# Altium PCB Source_module.PcbDoc (part 1 of 2)
Units mil, origin at the board's own origin, x right, y up, seen from the top; angles counter-clockwise.
Board outline 3715 x 2515 mil, 2 copper layers (Top Layer, Bottom Layer); 125 components, 72 nets, 409 pads, 106 vias.
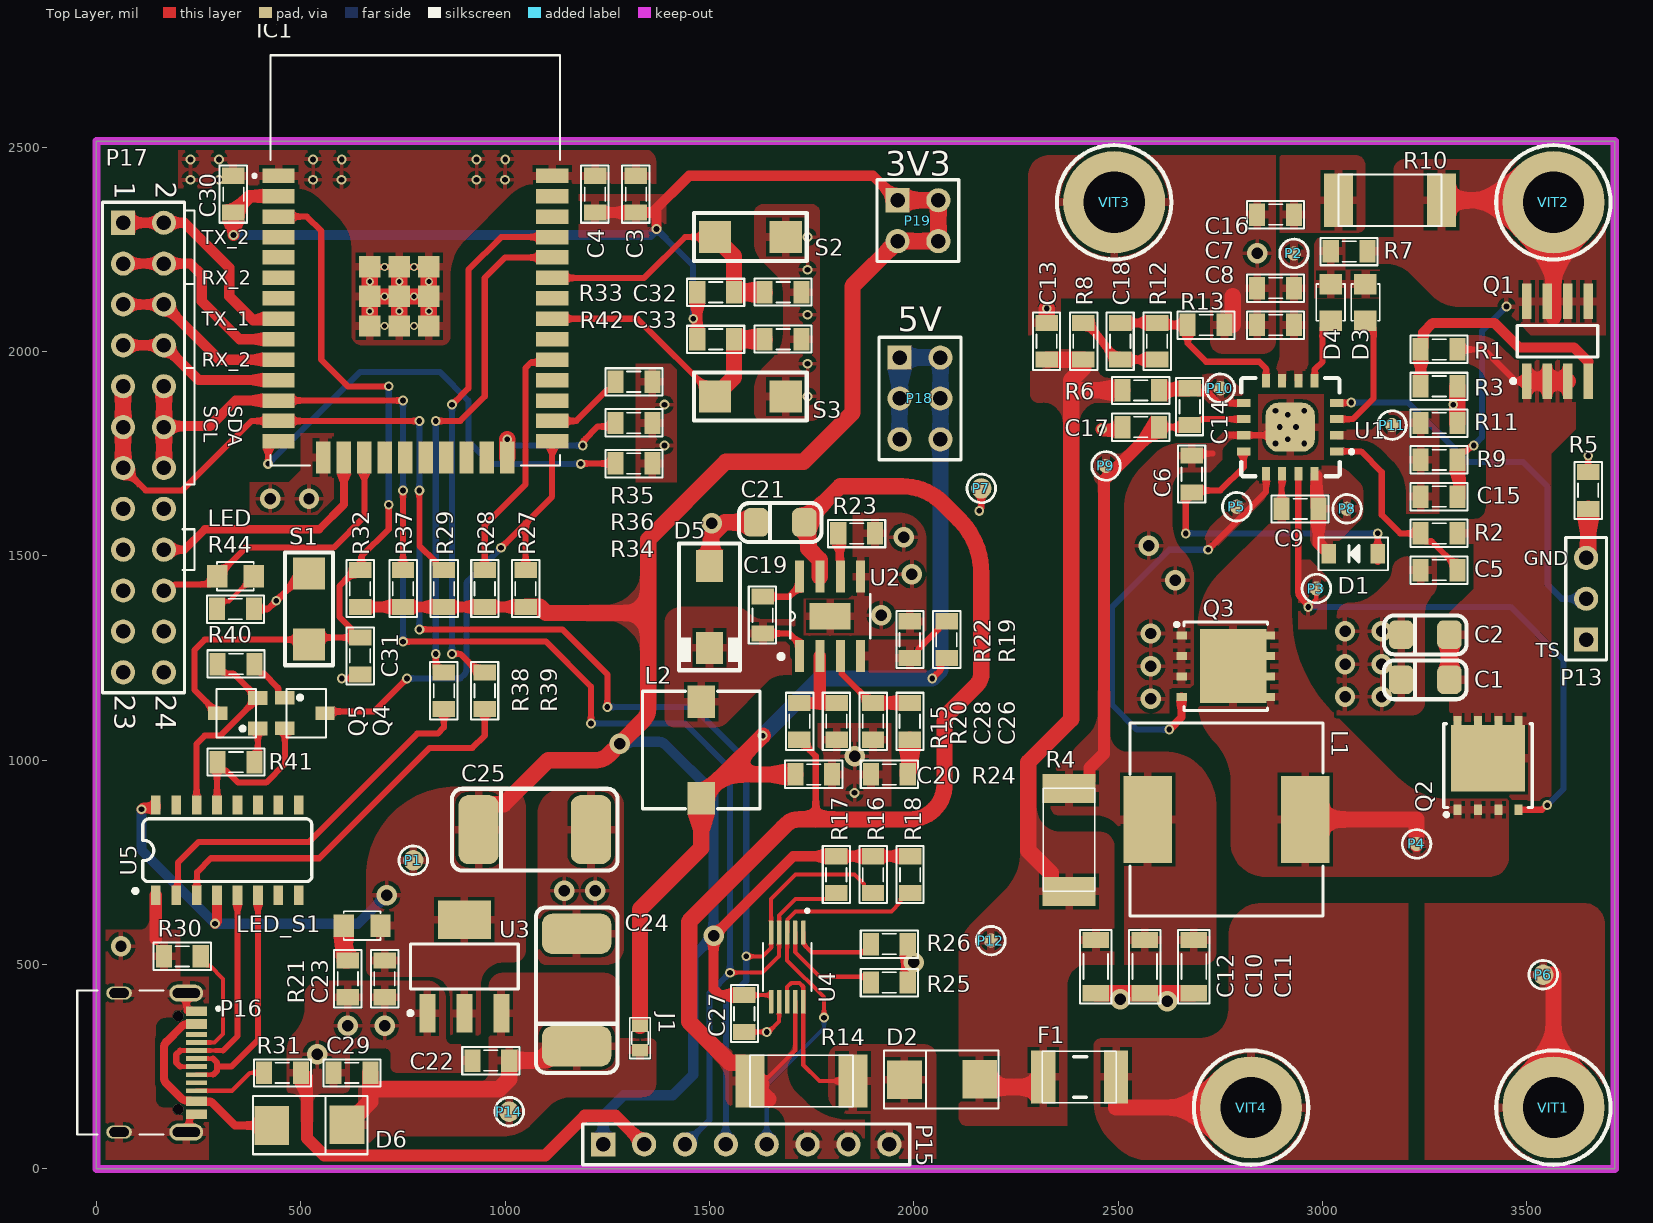
[diagram p0: Top Layer view]
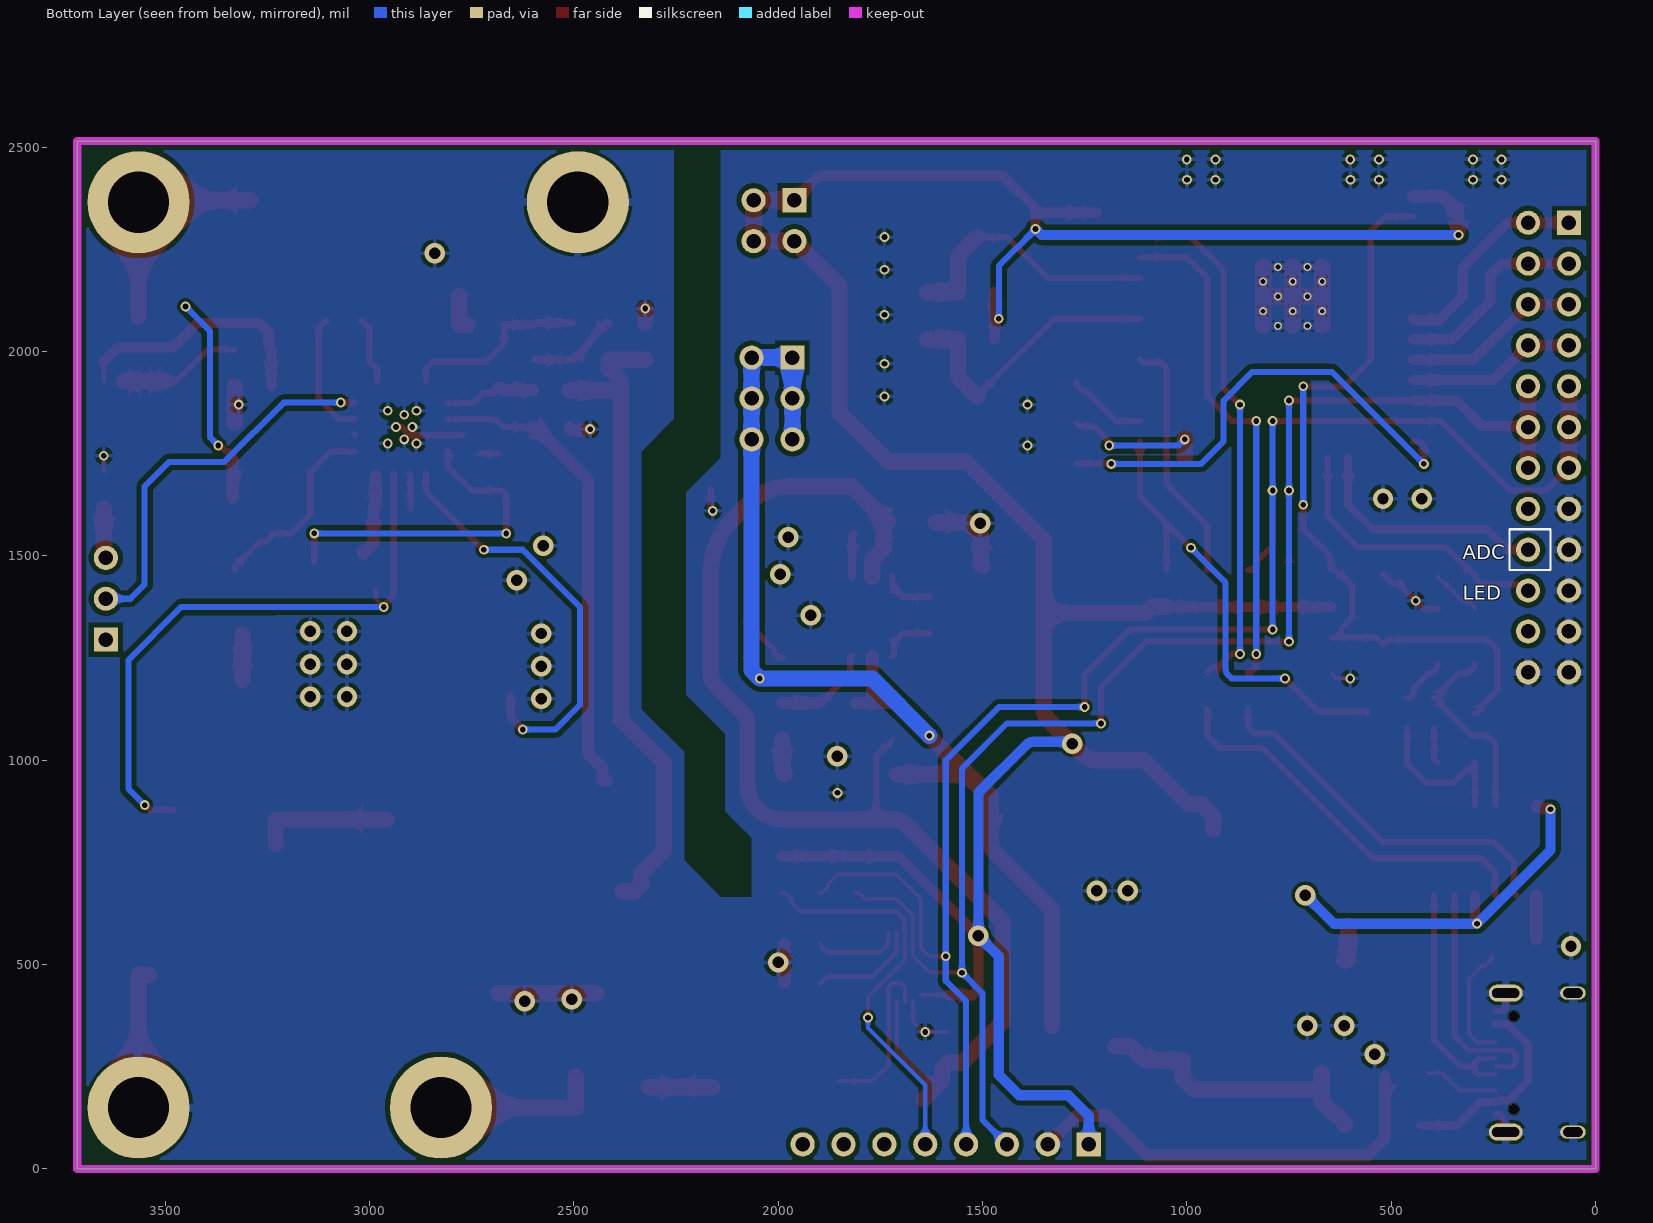
[diagram p1: Bottom Layer view, seen from below]
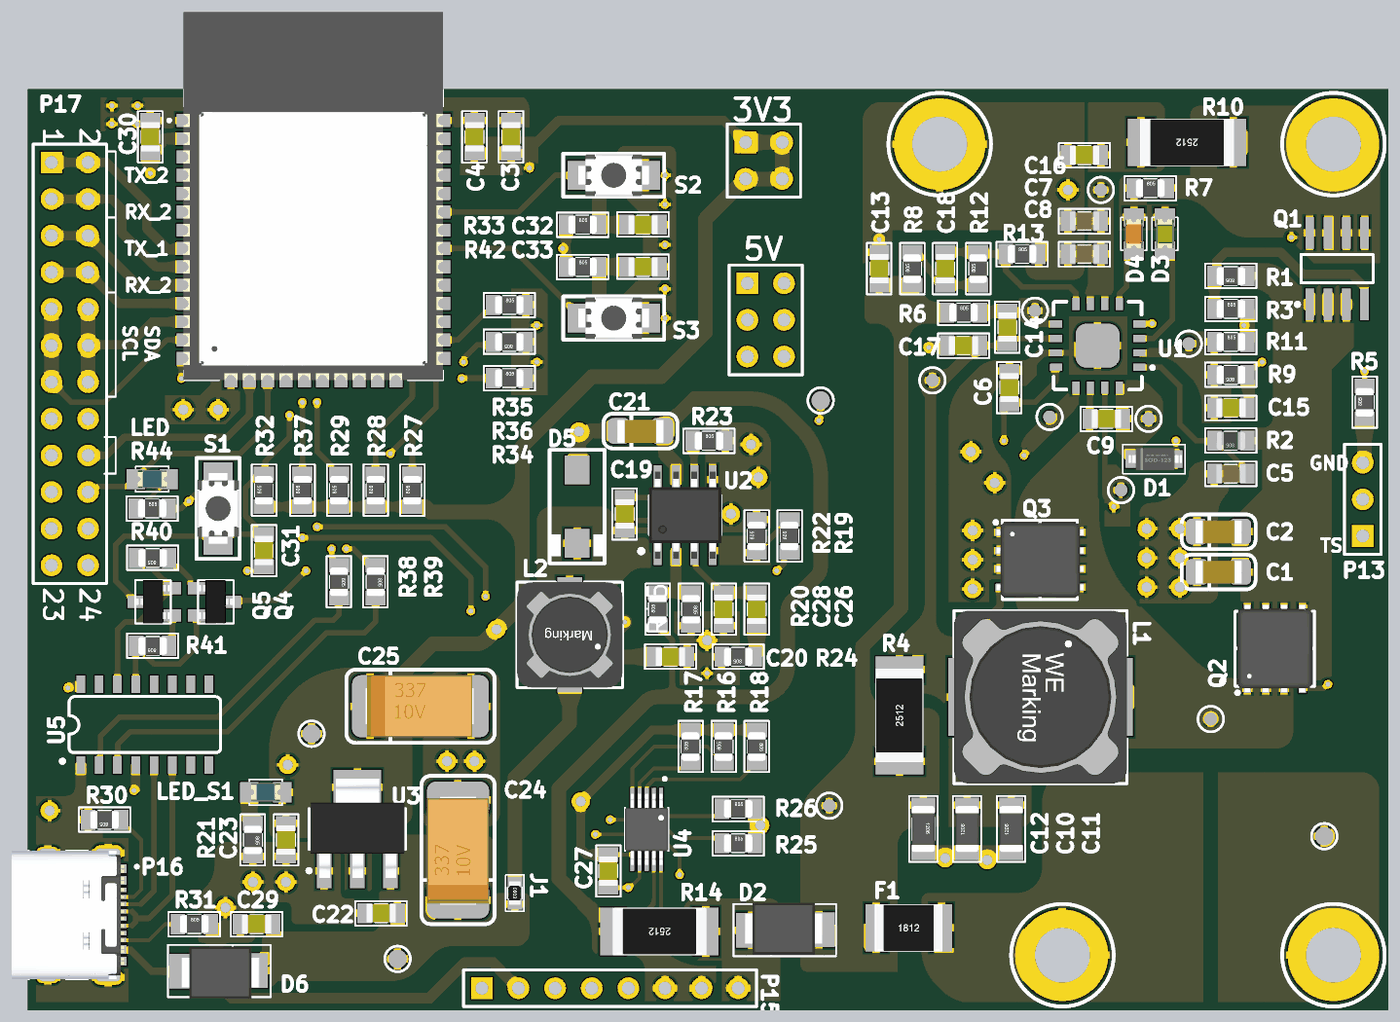
[diagram p3: 3D render of the assembled board from above, using the file's embedded part models]

## Layer stack, top to bottom
Top Solder: solder mask 0.4, Solder Resist, Dk 3.5
Top Layer: signal copper 1.4
Dielectric 1: dielectric 12.6, FR-4, Dk 4.8
Bottom Layer: signal copper 1.4
Bottom Solder: solder mask 0.4, Solder Resist, Dk 3.5

## Board outline
0,0 0,2515 3715,2515 3715,0

## Design rules (kind name [scope] priority, off if disabled: settings)
Clearance [All] p1: gap=8 ignorepadtopadclearanceinfootprint=FALSE except(0: Arc-Text Track-Text SMDPad-Text THPad-Text Via-Text Fill-Text Poly-Text Region-Text Text-Text Text-Hole; 2: Arc-Hole Track-Hole SMDPad-Hole THPad-Hole Via-Hole Fill-Hole Poly-Hole Region-Hole; 10: SMDPad-SMDPad; 12: Arc-THPad Arc-Fill Arc-Poly Arc-Region Track-THPad Track-Fill Track-Poly Track-Region SMDPad-THPad SMDPad-Fill SMDPad-Poly SMDPad-Region THPad-THPad THPad-Fill THPad-Poly THPad-Region)
HoleSize [All] p1: absolutevalues=TRUE maxlimit=500 minlimit=1 maxpercent=80.000 minpercent=20.000
MinimumSolderMaskSliver [All] p1: minsoldermaskwidth=0
PlaneClearance [All] p1: clearance=15
PolygonConnect [All] p1: connectstyle=Relief reliefconductorwidth=20 reliefentries=4 polygonreliefangle="90 Angle" airgapwidth=8
RoutingVias [All] p1: holewidth=28 width=50 viastyle="Through Hole" minholewidth=12 minwidth=20 maxholewidth=28 maxwidth=50 useviatemplates=TRUE viatemplateguid#1={0AE3DA34-20A3-40D7-BF29-14C71387055A} viatemplateguid#2={3618F590-4764-4A82-9657-7B64999567A2} viatemplatename#1=v61h36_503323056 viatemplatename#2=v127h71_503323056
SilkToSilkClearance [All] p1: silktosilkclearance=0
SilkToSolderMaskClearance [IsPad] p1: minsilkscreentomaskgap=0 clearancetoexposedcopper=TRUE
SolderMaskExpansion [All] p1: expansion=4 istentingtop=FALSE
SupplyNets "Schematic Supply Nets" [InNet('5V-USB')] p1: voltage=0.000
SupplyNets "Schematic Supply Nets_6" [InNet('5V')] p2: voltage=0.000
SupplyNets "Schematic Supply Nets_5" [InNet('3V3_BQ')] p3: voltage=0.000
SupplyNets "Schematic Supply Nets_2" [InNet('GND')] p4: voltage=0.000
SupplyNets "Schematic Supply Nets_1" [InNet('3V3')] p5: voltage=0.000
UnRoutedNet [All] p1: checkbadconnections=TRUE
Width [All] p1: maxlimit=40 minlimit=10 preferedwidth=15
24 further rules are at their usual default settings.

## Classes and differential pairs
component class Controller: C29 C30 C31 C32 C33 D6 IC1 LED P16 P17 P18 P19 Q4 Q5 R27 R28 R29 R30 R31 R32 R33 R34 R35 R36 R37 R38 R39 R40 R41 R42 R44 S1 S2 S3 U5
component class Source: C1 C2 C3 C4 C5 C6 C7 C8 C9 C10 C11 C12 C13 C14 C15 C16 C17 C18 C19 C20 C21 C22 C23 C24 C25 C26 C27 C28 D1 D2 D3 D4 D5 F1 J1 L1 L2 LED_S1 P1 P2 P3 P4 P5 P6 P7 P8 P9 P10 P11 P12 P13 P14 P15 Q1 Q2 Q3 R1 R2 R3 R4 R5 R6 R7 R8 R9 R10 R11 R12 R13 R14 R15 R16 R17 R18 R19 R20 R21 R22 R23 R24 R25 R26 SW1 U1 U2 U3 U4 VIT1 VIT2 VIT3 VIT4 Z1 Z2

## Components (designator, comment, footprint, x,y, rotation, side; value= is the part's Value field where it differs from the comment)
C1 "10uF" CAP_3216 3253.5,1195 r0 top value=33p
C2 "10uF" CAP_3216 3253.5,1305 r0 top value=33p
C3 "100nF" CAP_0805 1320,2385 r270 top value=33p
C4 "100nF" CAP_0805 1220,2385 r270 top value=33p
C5 "100nF" CAP_0805 3285,1465 r0 top value=33p
C6 "10uF" CAP_0805 2680,1700 r270 top value=33p
C7 "10uF" CAP_0805 2885,2155 r0 top value=33p
C8 "10uF" CAP_0805 2885,2065 r0 top value=33p
C9 "1uF" CAP_0805 2945,1615 r0 top value=33p
C10 "10uF 50V" CAP_1206 2565,495 r90 top value=33p
C11 "10uF 50V" CAP_1206 2685,495 r90 top value=33p
C12 "4.7uF 50V" CAP_1206 2445,495 r270 top value=33p
C13 "100nF" CAP_0805 2325,2025 r270 top value=33p
C14 "10uF" CAP_0805 2675,1865 r270 top value=33p
C15 "22pF" CAP_0805 3285,1645 r0 top value=33p
C16 "2.2uF" CAP_0805 2885,2335 r0 top value=33p
C17 "10uF" CAP_0805 2555,1815 r0 top value=33p
C18 "100nF" CAP_0805 2505,2025 r270 top value=33p
C19 "100nF" CAP_0805 1630,1355 r270 top value=33p
C20 "22uF 6.3V" CAP_0805 1755,965 r180 top value=33p
C21 "10uF 50V" CAP_3216 1675,1580 r0 top value=33p
C22 "100nF" CAP_0805 965,265 r0 top value=33p
C23 "100nF" CAP_0805 705,465 r90 top value=33p
C24 "100uF" CAP_7343 1175,435 r90 top
C25 "100uF" CAP_7343 1070,830 r0 top
C26 "220pF" CAP_0805 1990,1095 r90 top value=33p
C27 "100nF" CAP_0805 1585,380 r90 top value=33p
C28 "100nF" CAP_0805 1900,1095 r90 top value=33p
C29 "100nF" CAP_0805 625,235 r0 top value=33p
C30 "100nF" CAP_0805 335,2385 r270 top value=33p
C31 "100uF" CAP_0805 645,1255 r90 top value=33p
C32 "100nF" CAP_0805 1680,2145 r180 top value=33p
C33 "100nF" CAP_0805 1680,2030 r180 top value=33p
D1 "1N5819" DIO-SMD-123 3075,1505 r0 top value="Diode c?m 1N5408"
D2 "Diode Schottky" DIO-214AA(SMB) 2075,220.7 r0 top
D3 "LED" LED-0805-Green 3105,2165 r270 top value="LED 3 ly Single Colour"
D4 "LED" LED-0805-Red 3020,2165 r270 top value="LED 3 ly Single Colour"
D5 "SS34-HF" SMA 1500,1375 r270 top value="Diode c?m 1N5408"
D6 "Diode Schottky" DIO-214AA(SMB) 515,105 r180 top
F1 "F1A" RES-SMD-1812 2395,225 r0 top value=Fuse
IC1 "ESP32-WROOM-32" MODULE_ESP32-WROOM-32 780.35,2222.91 r0 top
J1 "Jumper2" RES-SMD-0402 1330,320 r270 top
L1 "10uH" L-SMD-M-12x10 2765,855 r270 top value="150 mH"
L2 "10uH" L-SMD-M-7.3x4.5 1480,1025 r0 top value="150 mH"
LED "Testing" LED-0805-Blue 295,1450 r0 top value="LED 3 ly Single Colour"
LED_S1 "LED_S" LED-0805-Blue 695,595 r180 top value="LED 3 ly Single Colour"
P1 "3V3" "Testpoint 50ml"#1 775,755 r0 top value="Test Point"
P2 "TP" "Testpoint 50ml"#2 2930,2240 r0 top value="Test Point"
P3 "TP" "Testpoint 50ml"#2 2985,1420 r90 top value="Test Point"
P4 "TP" "Testpoint 50ml"#2 3230,795 r0 top value="Test Point"
P5 "TP" "Testpoint 50ml"#2 2790,1620 r0 top value="Test Point"
P6 "TP" "Testpoint 50ml"#1 3540,475 r0 top value="Test Point"
P7 "TP" "Testpoint 50ml"#1 2165,1665 r0 top value="Test Point"
P8 "TP" "Testpoint 50ml"#2 3060,1615 r0 top value="Test Point"
P9 "TP" "Testpoint 50ml"#2 2470,1720 r0 top value="Test Point"
P10 "TP" "Testpoint 50ml"#2 2750,1910 r0 top value="Test Point"
P11 "TP" "Testpoint 50ml"#2 3170,1820 r0 top value="Test Point"
P12 "TP" "Testpoint 50ml"#2 2188.46,558.46 r0 top value="Test Point"
P13 "Header 3" HDR1X3 3645,1295 r90 top
P14 "TP" "Testpoint 50ml"#1 1010,140 r0 top value="Test Point"
P15 "Header 8" HDR1X8 1240,60 r0 top
P16 "USB - TypeC - 16P" "USB C 16P" 130,260 r270 top
P17 "Header 12X2" HDR2X12 65,2315 r270 top
P18 "5V" HDR2X3 1965,1985 r270 top
P19 "3V3" HDR2X2 1960,2370 r270 top
Q1 "AO4407A" SOIC-8 3575,2025 r90 top
Q2 "AON6508" MOSFET_HP_8Pin 3405,986.89 r90 top
Q3 "AON6508" MOSFET_HP_8Pin 2763.27,1230 r0 top
Q4 "2SC1815" SOT23D 510,1115 r270 top value=C1815
Q5 "2SC1815" SOT23D 345.66,1115 r90 top value=C1815
R1 "10R" RES-SMD-0805 3285,2005 r180 top
R2 "10R" RES-SMD-0805 3285,1555 r180 top
R3 "10R" RES-SMD-0805 3285,1915 r0 top
R4 "0.05R" RES-SMD-2512 2385,805 r90 top
R5 "10k" RES-SMD-0805 3650,1660 r90 top
R6 "0R" RES-SMD-0805 2555,1905 r0 top
R7 "1000" RES-SMD-0805 3065,2245 r0 top
R8 "0R" RES-SMD-0805 2415,2025 r90 top
R9 "499k" RES-SMD-0805 3285,1735 r180 top
R10 "2R" RES-SMD-2512 3165,2375 r180 top
R11 "36k" RES-SMD-0805 3285,1825 r0 top
R12 "499k" RES-SMD-0805 2595,2025 r90 top
R13 "100k" RES-SMD-0805 2715,2065 r0 top
R14 "0.05R" RES-SMD-2512 1725,220 r180 top
R15 "100k" RES-SMD-0805 1720,1095 r90 top
R16 "10k" RES-SMD-0805 1900,720 r270 top
R17 "10k" RES-SMD-0805 1810,720 r270 top
R18 "10k" RES-SMD-0805 1991,720 r270 top
R19 "249k" RES-SMD-0805 2080,1295 r90 top
R20 "24.9k" RES-SMD-0805 1811,1095 r270 top
R21 "220" RES-SMD-0805 615,465 r270 top
R22 "47k" RES-SMD-0805 1990,1295 r90 top
R23 "200k" RES-SMD-0805 1860,1555 r0 top
R24 "68.1k" RES-SMD-0805 1940,965 r180 top
R25 "10k" RES-SMD-0805 1940,456 r0 top
R26 "10k" RES-SMD-0805 1940,550 r0 top
R27 "1k" RES-SMD-0805 1050,1420 r90 top
R28 "1k" RES-SMD-0805 950,1420 r90 top
R29 "1k" RES-SMD-0805 850,1420 r90 top
R30 "5k1" RES-SMD-0805 210,520 r180 top
R31 "5k1" RES-SMD-0805 455,235 r0 top
R32 "10k" RES-SMD-0805 645,1420 r90 top
R33 "10k" RES-SMD-0805 1515,2145 r0 top
R34 "1k" RES-SMD-0805 1315,1726 r0 top
R35 "1k" RES-SMD-0805 1315,1926 r0 top
R36 "1k" RES-SMD-0805 1315,1825 r180 top
R37 "1k" RES-SMD-0805 750,1420 r90 top
R38 "0R" RES-SMD-0805 850,1170 r270 top
R39 "0R" RES-SMD-0805 950,1170 r270 top
R40 "1k" RES-SMD-0805 341.33,1235 r180 top
R41 "1k" RES-SMD-0805 341.33,995 r180 top
R42 "10k" RES-SMD-0805 1515,2030 r0 top
R44 "220" RES-SMD-0805 340,1370 r0 top
S1 "SW-SMD" "SW 3x2x4" 520,1370 r270 top
S2 "SW-SMD" "SW 3x2x4" 1600,2280 r180 top
S3 "SW-SMD" "SW 3x2x4" 1600,1890 r180 top
U1 "BQ24650" VQFN-16 2921,1814.68 r90 top
U2 "MP1584" SOP8-PP 1795.01,1351.99 r90 top
U3 "LM1117" SOT-223 900,495 r0 top
U4 "INA226" VSSOP-10 1690,493.74 r270 top
U5 "CH340C" SOP-16 320,780 r0 top
VIT1 "1" VIT 3565,150 r0 top
VIT2 "1" VIT 3565,2365 r0 top
VIT3 "1" VIT 2490,2365 r0 top
VIT4 "1" VIT 2825,150 r0 top

## Footprints (in the part's own frame and the unit in brackets; to place one, negate y for a bottom-side part, rotate by r counter-clockwise, add the part's x,y. Pads: shape width x height; smd on the part's side, far side on the other; paste and mask are expansions set on the pad)
CAP_0805 [mil]
  rect 39.37x55 smd: 1(-45,0) 2(45,0)
  silkscreen extent -70,-34 70,33, body extent -40,-25 40,25, height 24
CAP_1206 [mil]
  rect 40x65 smd: 1(-65,0) 2(65,0)
  silkscreen extent -90,-38 90,39, body extent -63,-31 63,32, height 40
CAP_3216 [mil]
  rrect50% 60x70 smd: 1(-60.99,2) 2(56.99,2)
  silkscreen extent -103,-46 99,49, body extent -65,-30 61,32, height 39
CAP_7343 [mm] "Capacitor Tantalum 7343"
  rrect50% 2.5x4.3 smd: 1(-3.429,0) 2(3.556,0)
  silkscreen extent -5.08,-2.54 5.21,2.54, body extent -3.75,-2.14 3.75,2.16, height 2.8
DIO-214AA(SMB) [mm] "DO-214AA Diode Middle Size"
  rect 2.16x2.4 smd: 1(2.184,-0.025) 2(-2.494,-0.076)
  silkscreen extent -3.76,-1.86 3.35,1.76, body extent -2.98,-1.76 2.42,1.86, height 2.43
DIO-SMD-123 [mm]
  rect 0.9x1.2 smd: 1(1.524,0) 2(-1.524,0)
  silkscreen extent -2.16,-1.02 2.16,1.02, body extent -1.76,-0.8 1.94,0.8, height 1.25
HDR1X3 [mm] "Connector; Header; 3 Position"
  rect 1.5x1.5 hole 0.9: 1(0,0)
  round 1.5 hole 0.9: 2(2.54,0) 3(5.08,0)
  silkscreen extent -1.27,-1.27 6.35,1.27, body extent -1.27,-1.27 6.35,1.27, height 7
HDR1X8 [mm] "Connector; Header; 8 Position"
  rect 1.5x1.5 hole 0.9: 1(0,0)
  round 1.5 hole 0.9: 2(2.54,0) 3(5.08,0) 4(7.62,0) 5(10.16,0) 6(12.7,0) 7(15.24,0) 8(17.78,0)
  silkscreen extent -1.27,-1.27 19.05,1.27, body extent -1.27,-1.27 19.05,1.27, height 7
HDR2X2 [mm] "Connector; Header; 2x2 Position"
  rect 1.5x1.5 hole 0.9: 1(0,0)
  round 1.5 hole 0.9: 2(0,2.54) 3(2.54,0) 4(2.54,2.54)
  silkscreen extent -1.27,-1.27 3.81,3.81, body extent -1.27,-1.27 3.81,3.81, height 7
HDR2X3 [mm] "Connector; Header; 3x2 Position"
  rect 1.5x1.5 hole 0.9: 1(0,0)
  round 1.5 hole 0.9: 2(0,2.54) 3(2.54,0) 4(2.54,2.54) 5(5.08,0) 6(5.08,2.54)
  silkscreen extent -1.27,-1.27 6.35,3.81, body extent -1.27,-1.27 6.35,3.81, height 7
HDR2X12 [mm] "Connector; Header; 12x2 Position"
  rect 1.5x1.5 hole 0.9: 1(0,0)
  round 1.5 hole 0.9: 2(0,2.54) 3(2.54,0) 4(2.54,2.54) 5(5.08,0) 6(5.08,2.54) 7(7.62,0) 8(7.62,2.54) 9(10.16,0) 10(10.16,2.54) 11(12.7,0) 12(12.7,2.54) 13(15.24,0) 14(15.24,2.54) 15(17.78,0) 16(17.78,2.54) 17(20.32,0) 18(20.32,2.54) 19(22.86,0) 20(22.86,2.54) 21(25.4,0) 22(25.4,2.54) 23(27.94,0) 24(27.94,2.54)
  silkscreen extent -1.27,-1.27 29.21,3.81, body extent -1.27,-1.27 29.21,3.81, height 1.5
L-SMD-M-7.3x4.5 [mm] "WE-PDA SMD Shielded Power Inductor, 7345"
  rect 1.7x2 smd: 1(0,3) 2(0,-3)
  silkscreen extent -3.65,-3.65 3.65,3.65, body extent -3.65,-3.65 3.65,3.65, height 4.05
L-SMD-M-12x10 [mm] "WE-PDA SMD Shielded Power Inductor, 1210"
  rect 5.4x3 smd: 1(0,4.9) 2(0,-4.9)
  silkscreen extent -6,-6 6,6, body extent -6,-6 6,6, height 9.7
LED-0805-Blue [mil]
  rect 50x55 smd: 1(0,0) 2(90,0)
  silkscreen extent 0,-35 90,35, body extent 5,-25 85,25, height 43
LED-0805-Green [mil]
  rect 50x55 smd: 1(0,0) 2(90,0)
  silkscreen extent 0,-35 90,35, body extent 5,-25 85,25, height 43
LED-0805-Red [mil]
  rect 50x55 smd: 1(0,0) 2(90,0)
  silkscreen extent 0,-35 90,35, body extent 5,-25 85,25, height 43
MODULE_ESP32-WROOM-32 [mm]
  rect 2x0.9 smd: 1(-8.5,5.26) 2(-8.5,3.99) 3(-8.5,2.72) 4(-8.5,1.45) 5(-8.5,0.18) 6(-8.5,-1.09) 7(-8.5,-2.36) 8(-8.5,-3.63) 9(-8.5,-4.9) 10(-8.5,-6.17) 11(-8.5,-7.44) 12(-8.5,-8.71) 13(-8.5,-9.98) 14(-8.5,-11.25) 25(8.5,-11.25) 26(8.5,-9.98) 27(8.5,-8.71) 28(8.5,-7.44) 29(8.5,-6.17) 30(8.5,-4.9) 31(8.5,-3.63) 32(8.5,-2.36) 33(8.5,-1.09) 34(8.5,0.18) 35(8.5,1.45) 36(8.5,2.72) 37(8.5,3.99) 38(8.5,5.26)
  rect 0.9x2 smd: 15(-5.715,-12.25) 16(-4.445,-12.25) 17(-3.175,-12.25) 18(-1.905,-12.25) 19(-0.635,-12.25) 20(0.635,-12.25) 21(1.905,-12.25) 22(3.175,-12.25) 23(4.445,-12.25) 24(5.715,-12.25)
  rect 1.33x1.33 smd: 39_1(-2.835,-0.405) 39_2(-1,-0.405) 39_3(0.835,-0.405) 39_4(-2.835,-2.24) 39_5(-1,-2.24) 39_6(0.835,-2.24) 39_7(-2.835,-4.075) 39_8(-1,-4.075) 39_9(0.835,-4.075)
  round 0.5 hole 0.3: 39_10(-1.917,-0.405) 39_11(-0.082,-0.405) 39_12(-2.835,-1.322) 39_13(-1,-1.322) 39_14(0.835,-1.322) 39_15(-1.917,-2.24) 39_16(-0.082,-2.24) 39_17(-2.835,-3.157) 39_18(-1,-3.157) 39_19(0.835,-3.157) 39_20(-1.917,-4.075) 39_21(-0.082,-4.075)
  silkscreen extent -10.1,-12.75 9,12.75, body extent -9.02,-12.75 8.98,12.75, height 3.2
MOSFET_HP_8Pin [mm]
  rect 0.65x0.5 smd: 1(-2.75,1.905) 2(-2.75,0.635) 3(-2.75,-0.635) 4(-2.75,-1.905)
  rect 0.55x0.5 smd: 5(2.795,-1.905) 6(2.795,-0.635) 7(2.795,0.635) 8(2.795,1.905)
  rect 4.12x4.6 smd: 9(0.46,0)
  silkscreen extent -3.13,-2.75 2.6,2.75, body extent -3,-2.75 3.05,2.75, height 0.95
RES-SMD-0402 [mil]
  rect 30x40 smd: 1(-30,0) 2(30,0)
  silkscreen extent -50,-25 50,25, body extent -31,-16 31,16, height 17
RES-SMD-0805 [mil]
  rect 39.37x55 smd: 1(-45,0) 2(45,0)
  silkscreen extent -70,-34 70,33, body extent -39,-25 39,25, height 31
RES-SMD-1812 [mm] "Chip Capacitor, Body 3.2x2.5mm, IPC Medium Density"
  rect 1.5x3.3 smd: 1(-1.996,0) 2(2.54,0)
  silkscreen extent -2.04,-1.6 2.54,1.6, body extent -2,-1.6 2.5,1.6, height 0.6
RES-SMD-2512 [mm] "Chip Capacitor, Body 3.2x2.5mm, IPC Medium Density"
  rect 1.8x3.3 smd: 1(-3.2,0.127) 2(3.2,0.127)
  silkscreen extent -3.2,-1.47 3.2,1.73, body extent -3.2,-1.47 3.2,1.73, height 0.6
SMA [mm]
  rect 2x1.7 smd: 1(-2.544,0) 2(2.544,0)
  silkscreen extent -3.94,-1.9 3.94,1.91, body extent -2.87,-1.4 2.87,1.4, height 2.29
SOIC-8 [mm] "SOIC, 8-Leads, Body 5,0x4,0mm (max), Pitch 1,27mm, IPC Medium Density"
  rect 2.2x0.6 smd: 1(-2.475,1.905) 2(-2.475,0.635) 3(-2.475,-0.635) 4(-2.475,-1.905) 5(2.475,-1.905) 6(2.475,-0.635) 7(2.475,0.635) 8(2.475,1.905)
  silkscreen extent -2.6,-2.5 0.98,2.88, body extent -3.2,-2.5 3.2,2.5, height 1.75
SOP8-PP [mil]
  rect 78x22 smd: 1(-96.99,75.01) 2(-96.99,25.01) 3(-96.99,-24.99) 4(-96.99,-74.99) 5(97.01,-74.99) 6(97.01,-24.99) 7(97.01,25.01) 8(97.01,75.01)
  rect 64x100 smd: 9(0,0)
  silkscreen extent -100,-98 54,121, body extent -119,-99 119,99, height 63
SOP-16 [mm]
  rect 0.6x1.2 smd: 1(-4.445,-2.8) 2(-3.175,-2.8) 3(-1.905,-2.8) 4(-0.635,-2.8) 5(0.635,-2.8) 6(1.905,-2.8) 7(3.175,-2.8) 8(4.445,-2.8) 9(4.445,2.8) 10(3.175,2.8) 11(1.905,2.8) 12(0.635,2.8) 13(-0.635,2.8) 14(-1.905,2.8) 15(-3.175,2.8) 16(-4.445,2.8)
  silkscreen extent -5.84,-2.67 5.26,1.95, body extent -4.95,-3.47 4.95,3.47, height 1.75
SOT23D [mm] "SOT 23C - 1-3-2 - BCE"
  rect 0.85x1.2 smd: 1(-0.95,-1.25) 2(0.94,-1.245) 3(0,1.25)
  silkscreen extent -1.5,-1.14 1.5,1.32, body extent -1.5,-1.17 1.5,1.33, height 1.06
SOT-223 [mm] "SOT223, 4-Leads, Body 6.5x3.5mm, Pitch 2.3mm, Lead Span 7mm, IPC Medium Density"
  rect 1x2.4 smd: 1(-2.3,-2.9) 2(0,-2.9) 3(2.3,-2.9)
  rect 3.3x2.4 smd: 2(0,2.9)
  silkscreen extent -3.47,-3.02 3.35,1.4, body extent -3.23,-3.39 3.27,3.5, height 1.72
"SW 3x2x4" [mm]
  rect 2x2 smd: 1(-2.2,0) 2(2.2,0)
  silkscreen extent -3.5,-1.5 3.5,1.5, body extent -2.45,-1.45 2.45,1.45, height 2
"Testpoint 50ml"#1 [mil]
  round 50 smd: 1(0,0)
  silkscreen extent -35,-35 35,35
"Testpoint 50ml"#2 [mil]
  round 35 smd: 1(0,0)
  silkscreen extent -35,-35 35,35
"USB C 16P" [mm]
  rect 0.6x1.3 smd: A1_B12(-3.2,2.921) A4_B9(-2.4,2.921) B1_A12(3.2,2.921) B4_A9(2.4,2.921)
  rect 0.3x1.3 smd: A5(-1.25,2.921) A6(-0.25,2.921) A7(0.25,2.921) A8(1.25,2.921) B5(1.75,2.921) B6(0.75,2.921) B7(-0.75,2.921) B8(-1.75,2.921)
  oval 1.05x2.1 hole 0.6 slot 1.7 at 90 deg: S1(-4.32,2.281) S2(4.32,2.281)
  oval 0.8x1.6 hole 0.6 slot 1.2 at 90 deg: S3(-4.32,-1.899) S4(4.32,-1.899)
  round 0.65 hole 0.65 unplated: ""(-2.89,1.781) ""(2.89,1.781)
  silkscreen extent -4.47,-4.5 4.47,4.37, body extent -4.47,-4.41 4.47,3.4, height 3.26
VIT [mil] "VIT"
  round 250 hole 150: VIT1(0,0)
  silkscreen extent -140,-140 140,140
VQFN-16 [mm]
  rect 0.5x0.85 smd: 1(-1.5,-2.895) 2(-0.5,-2.895) 3(0.5,-2.895) 4(1.5,-2.895) 9(1.5,2.89) 10(0.5,2.89) 11(-0.5,2.89) 12(-1.5,2.89)
  rect 0.85x0.5 smd: 5(2.891,-1.5) 6(2.891,-0.5) 7(2.891,0.5) 8(2.891,1.5) 13(-2.9,1.5) 14(-2.9,0.5) 15(-2.9,-0.5) 16(-2.9,-1.5)
  rrect50% 3.048x3.048 smd: 17(0,0)
  silkscreen extent -3.05,-3.91 3.05,3.05, body extent -3,-3 3,3, height 0.8
VSSOP-10 [mm]
  rrect25% 1.47x0.28 smd: 1(-2.15,1) 2(-2.15,0.5) 3(-2.15,0) 4(-2.15,-0.5) 5(-2.15,-1) 6(2.15,-1) 7(2.15,-0.5) 8(2.15,0) 9(2.15,0.5) 10(2.15,1)
  silkscreen extent -3.6,-1.5 1.5,1.5, body extent -2.46,-1.5 2.46,1.5, height 1.1

## Part data
C1 C2: library part CapSMD, "C 3216", LatestRevisionDate=17-Jul-2002, LatestRevisionNote="Re-released for DXP Platform.", PackageReference=RAD-0.3, Published=8-Jun-2000, Publisher="Altium Limited"
C3 C4 C5 C6 C7 C8 C9 C13 C14 C15 C16 C17 C18 C19 C20 C22 C23 C26 C27 C28 C29 C30 C31 C32 C33: library part CapSMD, "C 0805", LatestRevisionDate=17-Jul-2002, LatestRevisionNote="Re-released for DXP Platform.", PackageReference=RAD-0.3, Published=8-Jun-2000, Publisher="Altium Limited"
C10 C11 C12 C21: library part CapSMD, "C 1206", LatestRevisionDate=17-Jul-2002, LatestRevisionNote="Re-released for DXP Platform.", PackageReference=RAD-0.3, Published=8-Jun-2000, Publisher="Altium Limited"
C24 C25: library part CAP_TAN_SMD, "C Tan 7343"
D1 D5: library part 1N5822, "Schottky Rectifiers"
D2 D6: "SS54"
D3 D4: "LED Single colour Green and Red"
F1: library part Fuse, "Fuse 5A", Designed by=VanDungEvn
IC1: "Bluetooth, WiFi Transceiver Module 2.4GHz ~ 2.5GHz Surface Mount", Package="Module Espressif Systems", Digi-Key_Part_Number=1904-1010-1-ND, Digi-Key_Purchase_URL=https://www.digikey.com/product-detail/en/espressif-systems/ESP32-WROOM-32/1904-1010-1-ND/8544305?utm_source=snapeda&utm_medium=aggregator&utm_campaign=symbol, MF="Espressif Systems", MP=ESP32-WROOM-32, SnapEDA_Link=https://www.snapeda.com/parts/ESP32-WROOM-32/Espressif%20Systems/view-part/2753322/?ref=snap
J1: "Jumper, 2-Pin"
L1: library part Inductor, "Inductor"
L2: library part Inductor, "6.8-10uH"
LED LED_S1: library part LED, "LED Single colour Green and Red"
P1 P2 P3 P4 P5 P6 P7 P8 P9 P10 P11 P12 P14: library part TP_1, "Test Point"
P13: "Header, 3-Pin", LatestRevisionDate=17-Jul-2002, LatestRevisionNote="Re-released for DXP Platform.", Publisher="Altium Limited"
P15: "Header, 8-Pin", LatestRevisionDate=17-Jul-2002, LatestRevisionNote="Re-released for DXP Platform.", Publisher="Altium Limited"
P17: "Header, 12-Pin, Dual row", LatestRevisionDate=17-Jul-2002, LatestRevisionNote="Re-released for DXP Platform.", Publisher="Altium Limited"
P18: library part "Header 3X2", "Header, 3-Pin, Dual row", LatestRevisionDate=17-Jul-2002, LatestRevisionNote="Re-released for DXP Platform.", Publisher="Altium Limited"
P19: library part "Header 2X2", "Header, 2-Pin, Dual row", LatestRevisionDate=17-Jul-2002, LatestRevisionNote="Re-released for DXP Platform.", Publisher="Altium Limited"
Q1: library part MOSFET-P, "MFET-ChP", componentlink1description="New link", ComponentLink1URL=https://linhkien.cxtvn.com/3834-ru20p7c-mosfet-p-ch-5a-20v-sot-23.html
Q2 Q3: library part MOSFET-N, "MFET-CHP"
Q4 Q5: library part C1815, "NPN 600mW, ECB"
R1 R2 R3 R5 R6 R7 R15 R16 R17 R18 R21 R23 R24 R25 R26 R27 R28 R29 R30 R31 R32 R33 R34 R35 R36 R37 R38 R39 R40 R41 R42 R44: library part "Resistor - SMD", "R 0805", Manufacturer="Generic Components", Class=Passive, Published=08/06/2000, Publisher="Altium Hobart Technology Centre"
R4 R14: library part "Resistor - SMD", "R 2512 1%", Manufacturer="Generic Components", Class=Passive, Published=08/06/2000, Publisher="Altium Hobart Technology Centre"
R8 R9 R11 R12 R13 R19 R20 R22: library part "Resistor - SMD", "R 0805 1%", Manufacturer="Generic Components", Class=Passive, Published=08/06/2000, Publisher="Altium Hobart Technology Centre"
R10: library part "Resistor - SMD", "R 2512", Manufacturer="Generic Components", Class=Passive, Published=08/06/2000, Publisher="Altium Hobart Technology Centre"
S1 S2 S3: "Switch", LatestRevisionDate=17-Jul-2002, LatestRevisionNote="Re-released for DXP Platform.", PackageReference=SPST-2, Published=24-Mar-1999, Publisher="Altium Limited"
U1: "BQ24650 Stand-Alone Synchronous Buck Battery Charge Controller for Solar Power / With Maximum Power Point Tracking"
U2: "MP1584, The wide 4.5V to 28V input range accommodates a   variety   of   step-down   applications, SOIC8E"
U3: "3V3 5V LDO, AMS1117, LDI1117", Creator="Nguyen Ba Bien", Website=http://group3i.net
U4: "Current Sensing IC"
U5: "USB to serial chip CH340", Package=Package, Availability=Unavailable, Check_prices=https://www.snapeda.com/parts/CH340C/WCH/view-part/5428851/?ref=eda, MF=WCH, MP=CH340C, Price=None, SnapEDA_Link=https://www.snapeda.com/parts/CH340C/WCH/view-part/5428851/?ref=snap
VIT1 VIT2 VIT3 VIT4: library part VIT, "Oc Vit"
P16: componentlink1description="New link", ComponentLink1URL=https://linhkien.cxtvn.com/6914-cong-type-c-cai-16p-usb-31-v2.html

## Via types
v1: diameter 24, hole 14, Top Layer to Bottom Layer, 75 vias
v2: diameter 50, hole 28, Top Layer to Bottom Layer, 31 vias

## Nets (pads, with @x,y where several pads share a name; then routed paths per layer and width w, separated by ;. In a path a pad name is that pad's centre, name@x,y a point inside that pad or via, vN(x,y) a via of type N, cw(c..) or ccw(c..) an arc to the next point about the centre after c; other vN are vias at no path point)
3V3: C3.2 C4.2 C23.2 C25.1 C27.2 C30.2 IC1.2 LED_S1.1 P1.1 P15.1 P19.1 P19.2 P19.3 P19.4 R16.1 R17.1 R18.1 R27.1 R28.1 R29.1 R32.1 R33.1 R37.1 R42.1 U3.2 U4.6 U5.4 U5.16 | length 8623.6
  Top Layer w10: C27.2@1585,425 1650.12,425 U4.6@1650.12,423.75
  Top Layer w25: v1(110,880) 112.9,882.9 144.31,882.9 145,883.59 U5.16@145,890.24 ; v1(290,600) 295,605 U5.4@295,669.76 ; R32.1@645,1375 R37.1@750,1375 R29.1@850,1375 R28.1@950,1375 R27.1@1050,1375 ; C4.2@1220,2340 C3.2@1327.82,2340 ; C3.2@1320,2340 1360,2340 ; v1(1370,2299.64) 1370,2340 1360,2340 ; R42.1@1470,2030 R33.1@1470,2145 ; C27.2@1585,425 1525,425 1510,440 v2(1510,570) 1705,765 R17.1@1810,765 R16.1@1900,765 R18.1@1991,765 ; P19.1@1960,2370 1900,2430 1450,2430 1360,2340
  Top Layer w30: v1(335,2285) C30.2@335,2340 342.81,2340 347.5,2344.69 347.5,2352.5 375,2380 IC1.2@445.71,2380
  Top Layer w40: C25.1@935,830 935,862.94 963.86,891.8 996.8,891.8 1105,1000 1223.43,1000 ccw(c1223.43,1040) 1251.68,1011.68 v2(1280,1040) 1338.33,1098.33 ccw(c1310,1126.57) 1342,1102.57 ccw(c1310,1126.57) 1350,1126.57 1350,1360 ; R27.1@1050,1375 1085,1375 1100,1360 1350,1360 ; P19.1@1960,2370 P19.2@2060,2370 P19.4@2060,2270 P19.3@1960,2270 1850,2160 1850,1850 1730,1730 1540,1730 1350,1540 1350,1360
  Bottom Layer w15: v1(1370,2299.64) 1460,2209.64 v1(1460,2080)
  Bottom Layer w25: v1(110,880) 110,780 v1(290,600) 640,600 v2(710,670) ; v1(335,2285) 1355.36,2285 v1(1370,2299.64) ; P15.1@1240,60 1240,130 1290,180 1410,180 1460,230 1460,520 v2(1510,570) 1510,920 1392.32,1037.68 ccw(c1374.64,1020) 1374.64,1045 1299.32,1045 ccw(c1299.32,1020) 1291.6,1043.78 v2(1280,1040)
3V3_BQ: C7.2 C8.2 P2.1 U1.6 U1.7
5V: C20.2 J1.1 L2.2 P18.1 P18.2 P18.3 P18.4 P18.5 P18.6 R19.1 | length 2643.2
  Top Layer w15: v1(2045,1200) 2065.19,1220.19 2065.19,1237.81 2077.38,1250 R19.1@2080,1250
  Top Layer w40: J1.1@1330,350 1330,635 1480,785 L2.2@1480,906.89 1480,912.8 1493.46,926.26 1496.26,926.26 1535,965 ; v1(1630,1060) 1535,965 ; C20.2@1710,965 1535,965
  Bottom Layer w40: v1(1630,1060) 1770,1200 v1(2045,1200) 2065,1220 P18.6@2065,1785 P18.4@2065,1885 P18.2@2065,1985 P18.1@1965,1985 P18.3@1965,1885 P18.5@1965,1785
5V-USB: C22.2 C24.1 C29.2 D6.2 J1.2 P14.1 U3.3 | length 728.1
  Top Layer w40: D6.2@613.2,108 613.2,112.72 635.72,135.24 640.45,135.24 670,164.79 670,195 ; C29.2@670,235 670,195 ; C24.1@1175,300 1137.07,300 1102.07,265 C22.2@1010,265 1010,220 985,195 670,195
ADC: IC1.16 P17.18 | length 601.3
  Top Layer w20: P17.18@165,1515 215,1515 265,1565 545,1565 605.35,1625.35 IC1.16@605.35,1740.63
Alert: P15.5 R18.2 U4.3 | length 976.8
  Top Layer w10: v1(1780,370) 1780,420 1690,510 U4.3@1690,578.39 1690.51,578.9 1690.51,610.51 1710,630 1945,630 1967.5,652.5 1967.5,660.32 1982.19,675 R18.2@1990,675
  Bottom Layer w10: P15.5@1640,60 1640,205 1780,345 v1(1780,370)
BTST: C9.2 D1.2 P8.1 U1.16 | length 205.3
  Top Layer w30: U1.16@2985.31,1695.25 2985.31,1619.69 C9.2@2990,1615 2990,1531.2 3007.57,1513.62 3012.28,1513.62 3015,1510.91 D1.2@3015,1505
Button: P17.22
D+: P16.A7 P16.B7 U5.5 | length 587.5
  Top Layer w10: 204.53,289.53 P16.B7@245,289.53 309.53,289.53 ; 204.84,250.16 P16.A7@245,250.16
  Top Layer w15: 204.53,289.53 195,280 195,260 204.84,250.16 ; 309.53,289.53 345,325 U5.5@345,669.76
D-: P16.A6 P16.B6 U5.6 | length 608.7
  Top Layer w10: P16.B6@245,230.47 285.47,230.47 ; P16.A6@245,269.84 285.16,269.84
  Top Layer w15: 285.16,269.84 295,260 295,240 285.47,230.47 ; 295.7,250.7 330.7,250.7 395,315 U5.6@395,669.76
EN: C31.2 IC1.3 Q5.3 R32.2 S1.2 | length 1923.8
  Top Layer w15: Q5.3@296.45,1115 289.56,1115 280.33,1124.23 280.33,1131.12 240,1171.45 240,1270 265,1295 508.39,1295 S1.2@520,1283.39 536.61,1300 C31.2@637.19,1300 ; IC1.3@445.71,2330 515,2330 550,2295 550,1980 616.02,1913.98 696.54,1913.98 696.89,1914.32 714.32,1914.32 v1(715,1915) ; R32.2@639.19,1470.81 639.19,1467.01 622.5,1450.31 618.7,1450.31 595,1426.61 595,1350 622.5,1322.5 622.5,1314.68 C31.2@637.19,1300 ; C31.2@645,1300 C31.2@637.19,1300 ; R32.2@645,1465 648.4,1468.4 648.4,1498.4 715,1565 v1(715,1625)
  Bottom Layer w15: v1(715,1625) v1(715,1915)
GND: C1.1 C2.1 C3.1 C4.1 C5.1 C6.1 C7.1 C8.1 C10.1 C11.1 C12.2 C13.1 C16.1 C17.1 C20.1 C21.1 C22.1 C23.1 C24.2 C25.2 C27.1 C28.1 C29.1 C30.1 C31.1 C32.1 C33.1 D5.1 IC1.1 IC1.15 IC1.38 IC1.39_1 IC1.39_2 IC1.39_3 IC1.39_4 IC1.39_5 IC1.39_6 IC1.39_7 IC1.39_8 IC1.39_9 IC1.39_10 IC1.39_11 IC1.39_12 IC1.39_13 IC1.39_14 IC1.39_15 IC1.39_16 IC1.39_17 IC1.39_18 IC1.39_19 IC1.39_20 IC1.39_21 P6.1 P7.1 P15.2 P16.A1_B12 P16.B1_A12 P16.S1 P16.S2 P16.S3 P16.S4 P17.15 P17.17 P17.19 P17.21 P17.23 P17.24 Q3.1 Q3.2 Q3.3 R3.2 R5.2 R11.2 R13.2 R20.2 R21.2 R22.2 R23.2 R24.2 R25.2 R26.2 R30.2 R31.2 R34.2 R35.2 R36.1 R44.2 S1.1 S2.1 S3.1 U1.11 U1.17 U2.5 U2.9 U3.1 U4.7 U5.1 VIT1.VIT1 VIT3.VIT1 | length 3840
  Top Layer w10: v1(600,1200) 635,1200 C31.1@645,1210 ; C27.1@1585,335 1645,335 1670.32,360.32 U4.7@1670.32,409.09 ; R5.2@3650,1705 v1(3650,1745)
  Top Layer w15: P16.S2@219.8,89.92 226.91,97.03 226.91,129.7 231.22,134.02 P16.B1_A12@245,134.02 ; P16.S1@219.8,430.08 219.8,385.98 P16.A1_B12@245,385.98 ; R44.2@385,1370 420,1370 v1(440,1390) 482.24,1432.24 495.63,1432.24 S1.1@520,1456.61 ; IC1.39_1@668.74,2206.97 IC1.39_3@813.23,2206.97 ; v1(2160,1610) 2160,1612.44 2165,1617.44 P7.1@2165,1665 ; C6.1@2685,1750 2730,1750 ; 2773,1795 U1.11@2807.22,1795 2901.32,1795 U1.17@2921,1814.68
  Top Layer w30: 145,563.18 U5.1@145,669.76 ; R31.2@515,225.09 515,75 557.16,32.84 1097.84,32.84 1195,130 1270,130 P15.2@1340,60 ; R25.2@1985,456 R26.2@1985,550 ; v1(2460,1810) 2462.89,1807.11 2505.31,1807.11 2510,1811.8 C17.1@2510,1815
  Top Layer w40: IC1.39_7@668.74,2062.48 IC1.39_17@668.74,2098.6 IC1.39_4@668.74,2134.72 ; IC1.39_1@668.74,2206.97 IC1.39_12@668.74,2170.85 IC1.39_4@668.74,2134.72 ; IC1.39_8@740.98,2062.48 IC1.39_18@740.98,2098.6 IC1.39_5@740.98,2134.72 ; IC1.39_2@740.98,2206.97 IC1.39_13@740.98,2170.85 IC1.39_5@740.98,2134.72 ; IC1.39_9@813.23,2062.48 IC1.39_19@813.23,2098.6 IC1.39_6@813.23,2134.72 ; IC1.39_3@813.23,2206.97 IC1.39_14@813.23,2170.85 IC1.39_6@813.23,2134.72 ; D5.1@1500,1475.16 1503.92,1479.08 1503.92,1548.92 1537,1582 C21.1@1614.01,1582 ; C13.1@2325,2070 v1(2325,2105) ; C12.2@2445,430 C10.1@2565,430 C11.1@2685,430 ; R13.2@2760,2065 2780,2065 2780,2135 ; R11.2@3330,1825 R3.2@3330,1915 ; P6.1@3540,475 3565,475 VIT1.VIT1@3565,150 ; IC1.39_4@668.74,2134.72 IC1.39_15@704.86,2134.72 IC1.39_5@740.98,2134.72 ; IC1.39_5@740.98,2134.72 IC1.39_16@777.11,2134.72 IC1.39_6@813.23,2134.72
  other v1: 1640,335 1855,920 1390,1770 2885,1775 2955,1775 2915,1785 2895,1815 2935,1815 2915,1845 2885,1855 2955,1855 1390,1870 3320,1870 1740,1890 1740,1970 1740,2090 1740,2200 1740,2280 230,2420 299.5,2420 530,2420 599.5,2420 930,2420 999.5,2420 230,2470 300,2470 530,2470 600,2470 930,2470 1000,2470
  other v2: 540,280 615,350 705,350 2620,410 2505,415 2000,505 60,545 1145,680 1220,680 1855,1010 2580,1150 3055,1155 3145,1155 2580,1230 3055,1235 3145,1235 2580,1310 3055,1315 3145,1315 1920,1355 2640,1440 1995,1455 2575,1525 1975,1545 1505,1580 425,1640 520,1640 2840,2240
HIDRV: P3.1 Q2.4 U1.15 | length 1512.2
  Top Layer w10: v1(2965,1375) 2984.52,1394.52 2984.52,1419.52 P3.1@2985,1420
  Top Layer w15: U1.15@2940.69,1700.51 2940.69,1409.93 ccw(c2955.69,1409.93) 2944.1,1400.4 v1(2965,1375) ; Q2.4@3480,878.62 3536.71,878.62 3548.09,890 v1(3550,890)
  Bottom Layer w15: v1(2965,1375) 3460,1375 3590,1245 3590,930 v1(3550,890)
IN+: D2.2 P15.8 R14.1 U4.8 U4.10 | length 412.4
  Top Layer w10: U4.8@1690,409.09 1690,445 1700,455 1720,455 1729.37,445.63 U4.10@1729.37,409.09 1729.37,254.5 1768.87,215 R14.1@1850.98,215